# Altium PCB bci02_corrected.PcbDoc
Units mil, origin at the board's own origin, x right, y up, seen from the top; angles counter-clockwise.
Board outline 1917.32 x 1437.01 mil, 2 copper layers (Top Layer, Bottom Layer), stack 12.8 mil thick; 69 components, 67 nets, 283 pads, 40 vias.
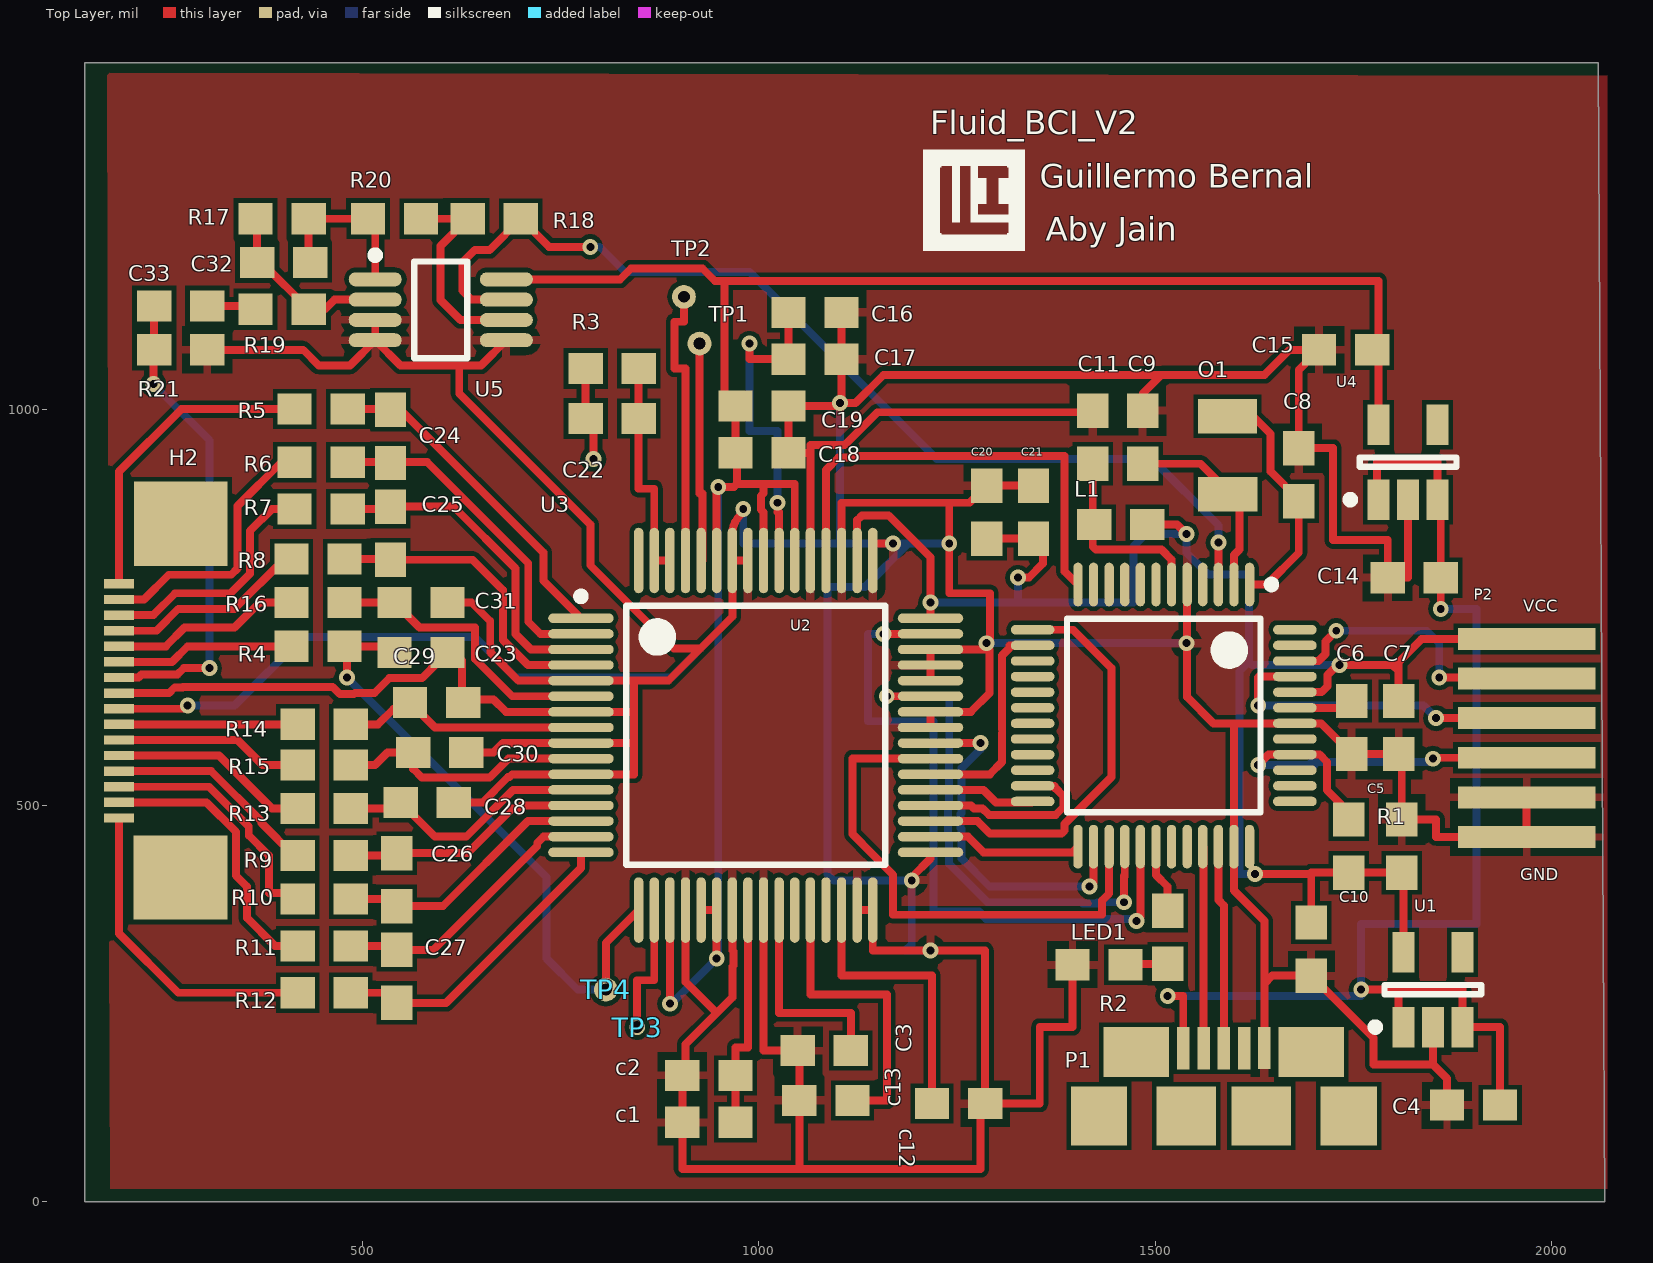
[diagram p0: Top Layer view]
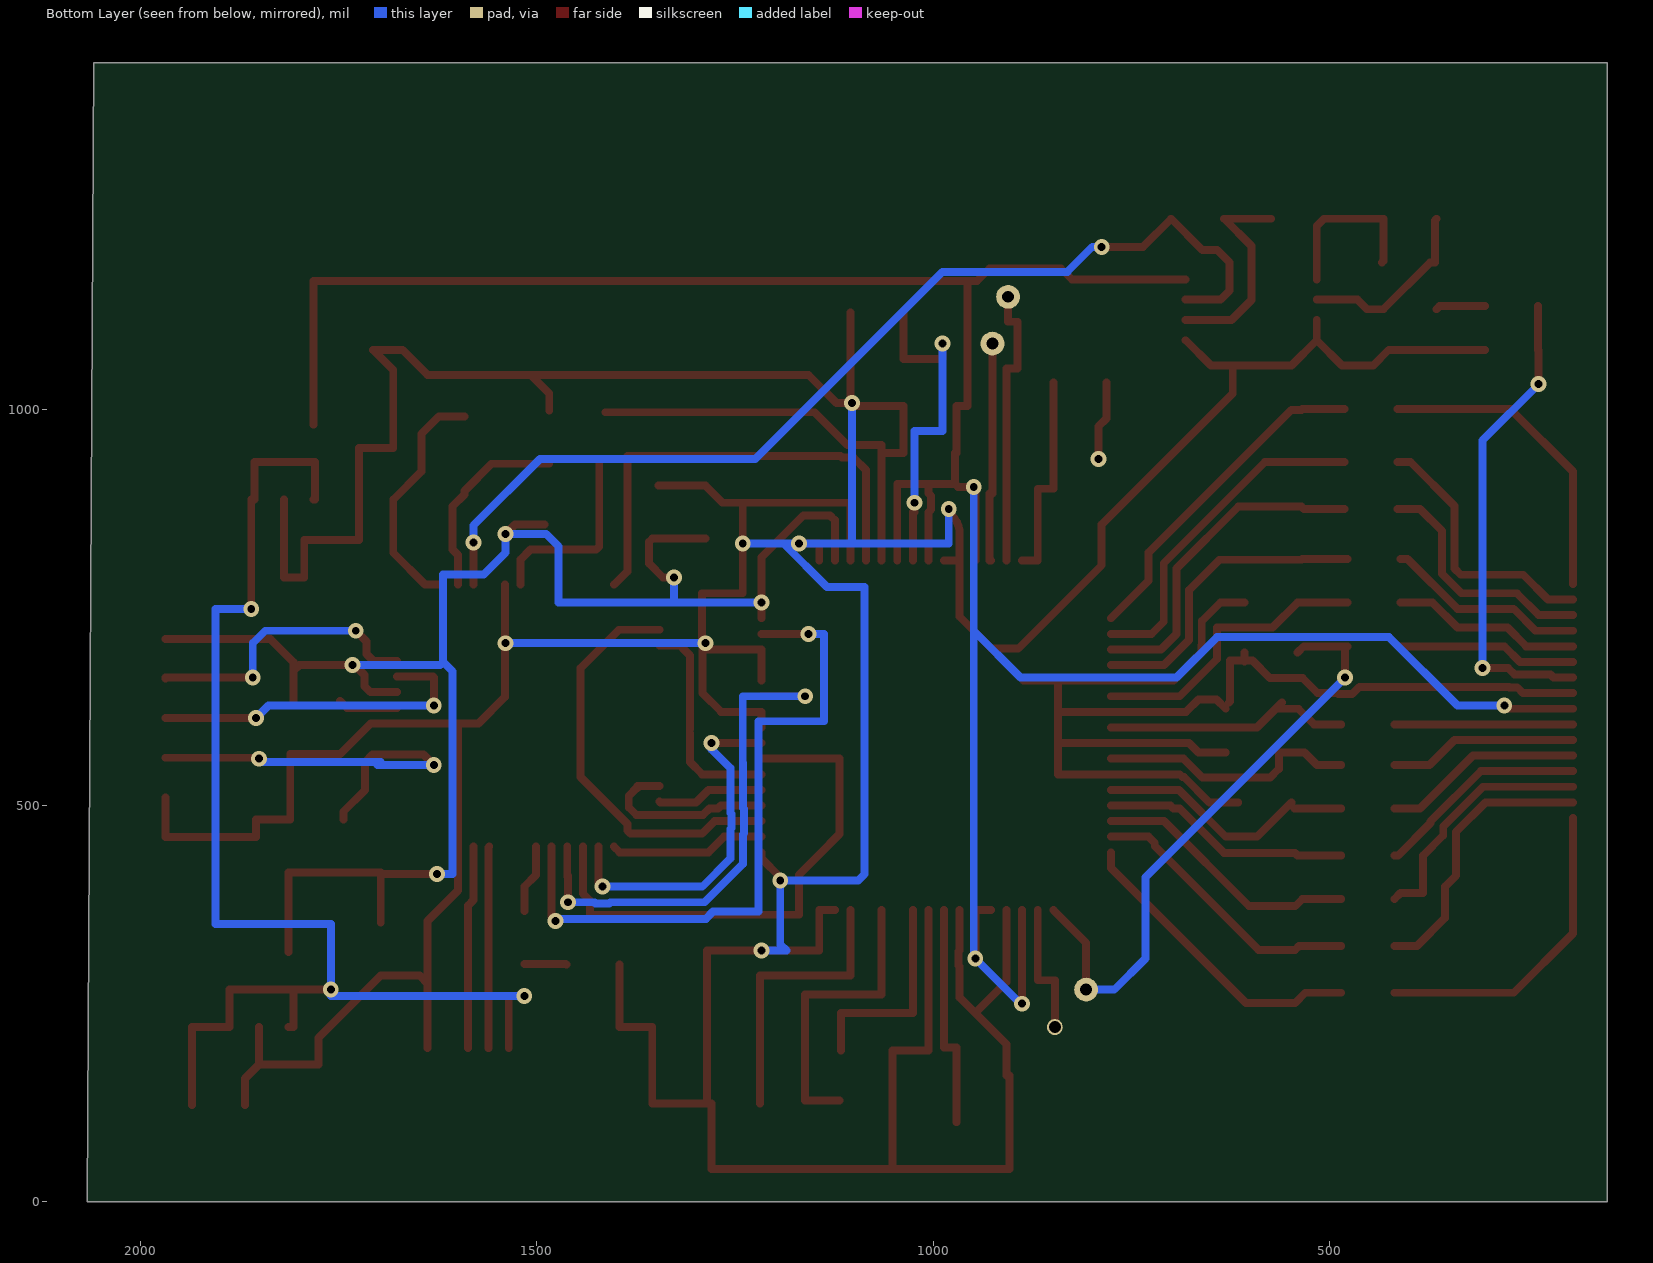
[diagram p1: Bottom Layer view, seen from below]

## Layer stack, top to bottom
Top Solder: solder mask 0.4, Solder Resist, Dk 3.5
Top Layer: signal copper 1.4
Dielectric 1: core 10, FR-4, Dk 4.2
Bottom Layer: signal copper 1.4
Bottom Solder: solder mask 0.4, Solder Resist, Dk 3.5

## Board outline
149.61,1437.01 149.61,0 2066.93,0 2059.06,1437.01
cut-out: 4921.26,576.77 4921.26,2155.59 4921.26,576.77

## Design rules (kind name [scope] priority, off if disabled: settings)
Clearance [All] p1: gap=6
HoleSize [All] p1: absolutevalues=TRUE maxlimit=100 minlimit=10 maxpercent=80.000 minpercent=20.000
PolygonConnect [All] p1: connectstyle=Relief reliefconductorwidth=10 reliefentries=4 polygonreliefangle="90 Angle" airgapwidth=10
RoutingVias [All] p1: holewidth=28 width=50 viastyle="Through Hole" minholewidth=28 minwidth=50 maxholewidth=28 maxwidth=50
SolderMaskExpansion [All] p1: expansion=4
Width [All] p1: maxlimit=10 minlimit=10 preferedwidth=10
29 further rules are at their usual default settings.

## Components (designator, comment, footprint, x,y, rotation, side; value= is the part's Value field where it differs from the comment)
c1 "1uF" 3-0603 937.01,100.39 r180 top
c2 "10uF" 3-0603 937.01,159.45 r180 top
C3 "1uF" 3-0603 1082.68,190.94 r180 top
C4 "10uF" 3-0603 1901.57,122.05 r180 top
C5 "100uF" 3-0603 1811.02,448.82 r90 top
C6 "0.1uF" 3-0603 1748.03,598.43 r270 top
C7 "0.1uF" 3-0603 1807.09,598.43 r270 top
C8 "18pF" 3-0603 1681.1,917.32 r90 top
C9 "18pF" 3-0603 1484.25,964.57 r90 top
C10 "Capacitor" 3-0603 1696.85,318.9 r90 top
C11 "0.1uF" 3-0603 1421.26,964.57 r270 top
c12 "1uF" 3-0603 1251.97,124.02 r0 top
c13 "100uF" 3-0603 1084.65,127.95 r180 top
C14 "10uF" 3-0603 1826.77,787.4 r180 top
C15 "100uF" 3-0603 1740.16,1074.8 r180 top
C16 "1uF" 3-0603 1070.87,1122.05 r180 top
C17 "0.1uF" 3-0603 1070.87,1062.99 r180 top
C18 "1uF" 3-0603 1003.94,944.88 r180 top
C19 "0.1uF" 3-0603 1003.94,1003.94 r180 top
C20 "1uF" 3-0603 1287.4,870.08 r270 top
C21 "0.1uF" 3-0603 1346.46,870.08 r270 top
C22 "1nF" 3-0603 814.96,988.19 r0 top
C23 "1uF" 0603W 574.8,692.91 r180 top
C24 "0.1uF" 0603W 535.43,964.57 r90 top
C25 "0.1uF" 0603W 535.43,842.52 r90 top
C26 "0.1uF" 0603W 543.31,405.51 r90 top
C27 "0.1uF" 0603W 543.31,283.46 r90 top
C28 "1uF" 0603W 582.68,503.94 r180 top
C29 "1uF" 0603W 594.49,629.92 r180 top
C30 "1uF" 0603W 598.43,566.93 r180 top
C31 "1uF" 0603W 574.8,755.91 r180 top
C32 "10nF" 0603W 401.57,1185.04 r180 top
C33 "0.1uF" 0603W 271.65,1129.92 r180 top
H2 "0.5mm 16pos FPC" "FPC 16 PIN 0.5mm" -300.28,645.61 r90 top
L1 "INDUCTOR Low DCR" 3-0603 1456.69,854.33 r0 top
LED1 "LED" 0603W 1515.75,334.65 r270 top
O1 "32.768 Crystal" "32.768 Crystal" 1590.55,988.19 r270 top
P1 "microB USB Receptacle" "MicroB USB Standarad SMT" 1556.36,242.25 r0 top
P2 "6 pin smd 1.27mm female" "1.27mm smd female" 1965.2,699.19 r270 top
R1 "10K" 3-0603 1744.09,448.82 r90 top
R2 "330" 3-0603 1429.13,299.21 r0 top
R3 "1M" 3-0603 814.96,1051.18 r0 top
R4 "1K" 0603W 444.88,700.79 r180 top
R5 "1K" 0603W 448.82,1000 r180 top
R6 "1K" 0603W 448.82,933.07 r180 top
R7 "1K" 0603W 448.82,874.02 r180 top
R8 "1K" 0603W 444.88,811.02 r180 top
R9 "1K" 0603W 452.76,437.01 r180 top
R10 "1K" 0603W 452.76,381.89 r180 top
R11 "1K" 0603W 452.76,322.83 r180 top
R12 "1K" 0603W 452.76,263.78 r180 top
R13 "1K" 0603W 452.76,496.06 r180 top
R14 "1K" 0603W 452.76,602.36 r180 top
R15 "1K" 0603W 452.76,551.18 r180 top
R16 "1K" 0603W 444.88,755.91 r180 top
R17 "1M" 0603W 397.64,1240.16 r0 top
R18 "2k" 0603W 665.35,1240.16 r0 top
R19 "1M" 0603W 397.64,1125.98 r0 top
R20 "1k" 0603W 539.37,1240.16 r0 top
R21 "300k" 0603W 271.65,1074.8 r180 top
TP1 "Test point small" "Test point small"#1 925.2,1082.68 r0 top
TP2 "Test point small" "Test point small"#1 905.51,1141.73 r90 top
TP3 "Test point small" "Test point small"#2 846.46,220.47 r90 top
TP4 "Test point small" "Test point small"#1 807.09,267.72 r90 top
U1 "MIC5205_VOLTAGE_REG" SOT-23-CT5_M 1850.39,267.72 r90 top
U2 "Component_1" TQFN48 1511.81,614.17 r270 top
U3 "ADS1299*" TI-PAG64_M 996.06,588.58 r0 top
U4 "MIC5205_VOLTAGE_REG" SOT-23-CT5_M 1818.9,933.07 r90 top
U5 "MCP6422" MSOP-MS8_N 598.43,1125.98 r0 top

## Footprints (in the part's own frame and the unit in brackets; to place one, negate y for a bottom-side part, rotate by r counter-clockwise, add the part's x,y. Pads: shape width x height; smd on the part's side, far side on the other; paste and mask are expansions set on the pad)
"1.27mm smd female" [mm] "female connector smd for 1,27mm"
  rect 0.7x4.4 smd: 1(-0.279,0.083) 2(0.99,0.084) 3(2.259,0.084) 4(3.529,0.084) 5(4.798,0.084) 6(6.068,0.085)
3-0603 [mm] "Chip Resistor; Body 1.6 x 0.9 mm (LxW typ)"
  rect 1.1x1 smd: 1(-0.85,0) 2(0.85,0)
"32.768 Crystal" [mm] "for BLE radio"
  rect 1.1x1.9 smd: 1(-0.07,0.019) 2(2.432,0.02)
  body extent -0.39,-0.71 2.81,0.78, height 0.9
0603W [mm]
  rect 1.1x1 smd: 1(-0.825,0) 2(0.875,0)
  body extent -0.8,-0.4 0.8,0.4, height 0.45
"FPC 16 PIN 0.5mm" [mm]
  rect 0.3x0.96 smd mask+0.06: 1(-4.099,-12.527) 2(-3.599,-12.527) 3(-3.099,-12.527) 4(-2.599,-12.527) 5(-2.099,-12.527) 6(-1.599,-12.527) 7(-1.099,-12.527) 8(-0.599,-12.527) 9(-0.099,-12.527) 10(0.401,-12.527) 11(0.901,-12.527) 12(1.401,-12.527) 13(1.901,-12.527) 14(2.401,-12.527) 15(2.901,-12.527) 16(3.401,-12.527)
  rect 2.7x3 smd mask+0.06: 17(-6.009,-14.497) 18(5.325,-14.505)
  body extent -7.54,-17.32 6.86,-12.22, height 2.05
"MicroB USB Standarad SMT" [mm] "FOR ZX Series Hirose"
  rect 0.4x1.35 smd: 1(-0.533,-1.232) 2(0.119,-1.231) 3(0.769,-1.23) 4(1.419,-1.229) 5(2.069,-1.229)
  rect 1.8x1.9 smd: NC(-3.235,-3.405) NC(4.768,-3.403)
  rect 2.1x1.6 smd: NC(-2.033,-1.357) NC(3.568,-1.353)
  rect 1.9x1.9 smd: NC(-0.432,-3.404) NC(1.968,-3.403)
  body extent -3.25,-6.17 4.66,-0.51, height 2.78
MSOP-MS8_N [mm]
  oval 1.7x0.45 smd: 1(-2.091,0.958) 2(-2.091,0.308) 3(-2.091,-0.342) 4(-2.091,-0.992) 5(2.109,-0.992) 6(2.109,-0.342) 7(2.109,0.308) 8(2.109,0.958)
  silkscreen extent -2.22,-1.57 0.86,1.86, body extent -1.59,-1.62 1.61,1.58, height 1.1
SOT-23-CT5_M [mm] "SOT23, 5-Leads, Body 2.9x1.6mm, Pitch 0.95mm, Lead Span 2.7mm, IPC Low Density"
  rect 1.3x0.7 smd: 1(-1.2,0.95) 2(-1.2,0) 3(-1.2,-0.95) 4(1.2,-0.95) 5(1.2,0.95)
  silkscreen extent -1.32,-1.55 0.15,1.97, body extent -0.9,-1.55 0.9,1.55, height 1.45
"Test point small"#1 [mil]
  round 30 hole 15: 0(0,0)
"Test point small"#2 [mil]
  round 20 hole 15: 0(0,0)
TI-PAG64_M [mm] "QFP, 64-Leads, Body 10x10mm, Pitch 0.5mm, IPC Low Density"
  oval 2.1x0.3 smd: 1(-5.6,3.75) 2(-5.6,3.25) 3(-5.6,2.75) 4(-5.6,2.25) 5(-5.6,1.75) 6(-5.6,1.25) 7(-5.6,0.75) 8(-5.6,0.25) 9(-5.6,-0.25) 10(-5.6,-0.75) 11(-5.6,-1.25) 12(-5.6,-1.75) 13(-5.6,-2.25) 14(-5.6,-2.75) 15(-5.6,-3.25) 16(-5.6,-3.75) 33(5.6,-3.75) 34(5.6,-3.25) 35(5.6,-2.75) 36(5.6,-2.25) 37(5.6,-1.75) 38(5.6,-1.25) 39(5.6,-0.75) 40(5.6,-0.25) 41(5.6,0.25) 42(5.6,0.75) 43(5.6,1.25) 44(5.6,1.75) 45(5.6,2.25) 46(5.6,2.75) 47(5.6,3.25) 48(5.6,3.75)
  oval 0.3x2.1 smd: 17(-3.75,-5.6) 18(-3.25,-5.6) 19(-2.75,-5.6) 20(-2.25,-5.6) 21(-1.75,-5.6) 22(-1.25,-5.6) 23(-0.75,-5.6) 24(-0.25,-5.6) 25(0.25,-5.6) 26(0.75,-5.6) 27(1.25,-5.6) 28(1.75,-5.6) 29(2.25,-5.6) 30(2.75,-5.6) 31(3.25,-5.6) 32(3.75,-5.6) 49(3.75,5.6) 50(3.25,5.6) 51(2.75,5.6) 52(2.25,5.6) 53(1.75,5.6) 54(1.25,5.6) 55(0.75,5.6) 56(0.25,5.6) 57(-0.25,5.6) 58(-0.75,5.6) 59(-1.25,5.6) 60(-1.75,5.6) 61(-2.25,5.6) 62(-2.75,5.6) 63(-3.25,5.6) 64(-3.75,5.6)
  silkscreen extent -5.72,-4.15 4.15,4.57, body extent -5,-5 5,5, height 1.2
TQFN48 [mm] "TSQFP, 48-Leads, Body 7.00x7.00mm, Pitch 0.50mm, IPC High Density"
  oval 1.4x0.3 smd mask+0.05: 1(-4.18,2.724) 2(-4.18,2.224) 3(-4.18,1.724) 4(-4.18,1.224) 5(-4.18,0.724) 6(-4.18,0.224) 7(-4.18,-0.276) 8(-4.18,-0.776) 9(-4.18,-1.276) 10(-4.18,-1.776) 11(-4.18,-2.276) 12(-4.18,-2.776) 25(4.22,-2.776) 26(4.22,-2.276) 27(4.22,-1.776) 28(4.22,-1.276) 29(4.22,-0.776) 30(4.22,-0.276) 31(4.22,0.224) 32(4.22,0.724) 33(4.22,1.224) 34(4.22,1.724) 35(4.22,2.224) 36(4.22,2.724)
  oval 0.3x1.4 smd mask+0.05: 13(-2.73,-4.226) 14(-2.23,-4.226) 15(-1.73,-4.226) 16(-1.23,-4.226) 17(-0.73,-4.226) 18(-0.23,-4.226) 19(0.27,-4.226) 20(0.77,-4.226) 21(1.27,-4.226) 22(1.77,-4.226) 23(2.27,-4.226) 24(2.77,-4.226) 37(2.77,4.174) 38(2.27,4.174) 39(1.77,4.174) 40(1.27,4.174) 41(0.77,4.174) 42(0.27,4.174) 43(-0.23,4.174) 44(-0.73,4.174) 45(-1.23,4.174) 46(-1.73,4.174) 47(-2.23,4.174) 48(-2.73,4.174)
  silkscreen extent -4.31,-3.13 3.12,3.55, body extent -4.48,-4.53 4.52,4.47, height 1.2

## Part data
c1 c2 C3 C6 C7 C8 C9 C11 c12 c13 C16 C17 C18 C19 C20 C21 C22 C23 C24 C25 C26 C27 C28 C29 C30 C31 C32 C33: library part Capacitor, "SMD Cap 1206"
C4 C5 C14 C15: library part "Polarized Cap"
C10: "SMD Cap 1206"
LED1: "LED SMD 1206/0603"
R1 R2 R3 R4 R5 R6 R7 R8 R9 R10 R11 R12 R13 R14 R15 R16 R17 R18 R19 R20 R21: library part Resistor
U1 U4: "5V LDO SMD"
U3: library part ADS1299, "IC AFE 24BIT 16KSPS LN 64TQFP"
U5: "4.4 µA/Amplifier, 90 kHz Op Amp"

## Via types
v1: diameter 20, hole 10, Top Layer to Bottom Layer, 40 vias

## Nets (pads, with @x,y where several pads share a name; then routed paths per layer and width w, separated by ;. In a path a pad name is that pad's centre, name@x,y a point inside that pad or via, vN(x,y) a via of type N, cw(c..) or ccw(c..) an arc to the next point about the centre after c; other vN are vias at no path point)
5V: C15.1 C18.2 C19.2 H2.8 U3.19 U3.21 U3.22 U3.54 U3.56 U3.59 U4.5 U5.8 | length 3676.9
  Top Layer w10: H2.8 275.59,622.05 v1(279.53,625.98) ; U5.8 825.11,1163.69 838.58,1177.17 929.13,1177.17 944.88,1161.42 956.69,1161.42 ; v1(887.8,250) U3.19 ; U3.21 U3.22 v1(946.85,307.09) ; U3.59 946.85,905.51 948.82,903.54 v1(948.82,901.57) 968.5,901.57 972.44,905.51 ; U3.56 1005.91,869.91 1002.62,873.19 1002.62,890.59 1005.91,893.87 1005.91,905.51 ; U3.54 1045.28,905.51 1005.91,905.51 ; U4.5 1781.5,1161.42 956.69,1161.42 ; 956.69,1161.42 956.69,1003.94 C19.2 C18.2 972.44,944.88 972.44,905.51 ; 972.44,905.51 1005.91,905.51
  Bottom Layer w10: v1(279.53,625.98) 338.58,625.98 425.2,712.6 641.73,712.6 692.91,661.42 889.76,661.42 948.82,720.47 ; v1(887.8,250) 889.76,250 v1(946.85,307.09) 948.82,307.09 948.82,720.47 ; v1(948.82,901.57) 948.82,720.47
A0: R18.2 U2.3 U5.7 | length 1307
  Top Layer w10: U5.7 637.49,1138.1 625.98,1149.61 625.98,1185.04 641.73,1200.79 660.43,1200.79 R18.2 735.24,1204.72 v1(787.4,1204.72) ; U2.3 v1(1579.69,831.66)
  Bottom Layer w10: v1(787.4,1204.72) 799.21,1204.72 830.71,1173.23 988.19,1173.23 1224.41,937.01 1496.06,937.01 1579.69,853.38 v1(1579.69,831.66)
BIAS: C22.1 R3.1 | length 100.5
  Top Layer w10: R3.1@781.5,1033.46 C22.1 791.34,978.35 v1(791.34,937.01)
BIASINV: TP2.0 U3.61 | length 358.3
  Top Layer w10: TP2.0 905.51,1110.24 893.7,1110.24 893.7,1051.18 907.48,1051.18 U3.61
CLK: U2.24 U3.37 | length 135.9
  Top Layer w10: U3.37 1283.46,519.68 1299.21,503.94 1344.24,503.94 U2.24
CLKSEL: U2.12 U3.52 | length 591.9
  Top Layer w10: U3.52 1084.65,923.23 1100.14,938.72 1114.89,938.72 1117.12,940.94 1385.83,940.94 1385.83,795.28 1402.34,778.76 U2.12
DRDY: U2.29 U3.47 | length 868.7
  Top Layer w10: v1(1157.48,716.54) U3.47 ; v1(1476.38,354.33) 1481.63,359.58 1481.63,447.68 U2.29
  Bottom Layer w10: v1(1157.48,716.54) 1137.8,716.54 1137.8,606.3 1220.47,606.3 1220.47,366.14 1277.58,366.14 1286.77,356.95 1473.75,356.95 v1(1476.38,354.33)
EDA-: C33.2 H2.10 R21.2 | length 605.5
  Top Layer w10: H2.10 217.53,661.42 221.22,665.1 266.47,665.1 274.6,673.23 v1(307.09,673.23) ; v1(236.22,1031.5) 236.22,1073.82 R21.2 C33.2
  Bottom Layer w10: v1(236.22,1031.5) 307.09,960.63 v1(307.09,673.23)
GND: c1.2 c2.2 C3.2 C4.2 C5.2 C6.2 C7.2 C8.2 C9.2 C10.1 C11.1 c12.2 c13.2 C14.2 C15.2 C16.1 C17.1 C18.1 C19.1 C20.1 C21.1 C23.1 C28.1 C29.1 C30.1 C31.1 H2.9 P1.5 P2.5 P2.6 R2.1 R21.1 U1.2 U2.5 U2.35 U2.42 U3.5 U3.7 U3.9 U3.11 U3.20 U3.23 U3.25 U3.31 U3.32 U3.33 U3.41 U3.42 U3.44 U3.45 U3.46 U3.49 U3.51 U3.53 U3.57 U3.58 U4.2 U5.3 U5.4 U5.5 | length 10845
  Top Layer w10: H2.9 255.91,641.73 263.28,649.1 273.1,649.1 273.6,649.61 462.43,649.61 471.62,640.42 489.01,640.42 490.33,641.73 514.96,641.73 533.83,660.61 574.98,660.61 597.19,682.82 C23.1@607.28,682.82 ; R21.1 425.2,1074.8 444.88,1055.12 484.29,1055.12 U5.4 ; U5.3 U5.4 ; C23.1@607.28,681.64 C23.1@607.28,682.82 ; C23.1 C23.1@607.28,682.82 ; C31.1 637.8,755.91 661.17,732.54 661.17,702.03 661.42,701.78 661.42,692.91 696.85,657.48 U3.5 842.52,657.48 ; C28.1 651.6,503.94 683.34,535.68 685.29,535.68 688.98,539.37 U3.11 842.52,539.37 842.52,578.74 ; C29.1 625.73,631.16 625.73,682.82 C23.1@607.28,682.82 ; C30.1 665.35,566.93 677.17,578.74 U3.9 842.52,578.74 ; C29.1@630.91,622.05 642.72,633.86 665.35,633.86 681.1,618.11 U3.7 842.52,618.11 ; U5.5 649.64,1055.12 622.05,1055.12 ; U3.20 907.48,277.56 944.88,240.16 ; U3.23 966.54,317.1 967.85,315.79 967.85,298.39 966.54,297.07 966.54,257.87 907.48,198.82 907.48,159.45 c2.2 c1.2 903.54,41.34 1051.18,41.34 ; v1@976.38,866.14 ccw(c1000.14,842.38) 966.54,842.38 U3.58 ; U3.57 U3.58 ; U3.25 1005.91,190.94 C3.2 1051.18,190.94 c13.2 1051.18,41.34 ; U3.53 1064.96,944.88 ; v1(1102.36,1007.87) v1@1104.33,1007.87 ; U3.51 1104.33,881.89 1240.16,881.89 ; C16.1 C17.1 v1@1104.33,1007.87 ; U3.31 U3.32 1143.7,316.93 v1(1216.54,316.93) 1285.43,316.93 c12.2 ; U3.49 1143.7,830.71 v1(1169.29,830.71) ; v1(1192.91,405.51) 1192.91,409.45 1216.54,433.07 U3.33 ; U3.41 U3.42 1267.39,618.11 1290.88,641.6 v1@1290.88,696.39 ; U3.44 U3.45 U3.46 v1@1287.4,696.85 ; v1@1291.34,709.2 1291.34,767.72 1240.16,767.72 v1(1240.16,830.71) 1240.16,881.89 ; C21.1 C20.1 1265.75,881.89 1240.16,881.89 ; R2.1 1395.67,220.47 1354.33,220.47 1354.33,124.02 c12.2 ; C11.1@1413.39,996.06 1149.61,996.06 1108.27,954.72 1064.96,954.72 1064.96,944.88 ; C9.2 1484.25,1019.69 1507.87,1043.31 ; U2.5 1540.32,636.85 1573.6,603.56 1602.36,603.56 ; P1.5 1637.8,275.6 ; U4.2 1818.9,787.4 C14.2 1793.31,834.65 1724.41,834.65 1724.41,950.79 C8.2 1681.1,1049.21 C15.2 1669.29,1074.8 1637.8,1043.31 1507.87,1043.31 ; U1.2 1850.39,173.23 ; C4.2 1868.11,155.51 1850.39,173.23 ; P2.5 P2.6 1854.33,460.3 1854.33,482.28 C5.2 1811.02,564.96 C7.2 C6.2 1709.43,603.56 U2.42 1602.36,603.56 ; U5.4 547.9,1055.12 622.05,1055.12 ; 622.05,1055.12 622.05,1019.69 787.4,854.33 787.4,803.15 892.72,697.83 926.18,697.83 ; 842.52,578.74 842.52,618.11 ; 842.52,618.11 842.52,657.48 ; 842.52,657.48 885.83,657.48 926.18,697.83 ; 926.18,697.83 966.54,738.19 U3.58 ; 1051.18,41.34 1279.53,41.34 1279.53,124.02 c12.2 ; 1064.96,944.88 C18.1 C19.1 1104.33,1003.94 v1@1104.33,1007.87 ; v1@1104.33,1007.87 1122.05,1007.87 1157.48,1043.31 1507.87,1043.31 ; 1602.36,603.56 1599.37,600.57 U2.35 1599.37,392.75 1637.8,354.33 1637.8,275.6 ; 1637.8,275.6 1647.64,285.43 C10.1 1775.59,206.69 1775.59,173.23 1850.39,173.23
  Bottom Layer w10: v1(980.32,874.02) 980.32,830.71 1102.36,830.71 ; v1(1102.36,1007.87) 1102.36,830.71 ; v1(1216.54,316.93) 1185.04,316.93 1192.91,324.8 v1(1192.91,405.51) 1094.49,405.51 1086.61,413.39 1086.61,775.59 1133.86,775.59 1188.98,830.71 ; v1(1240.16,830.71) 1188.98,830.71 ; v1(1287.4,704.72) v1(1539.37,704.72) ; 1102.36,830.71 v1(1169.29,830.71) 1188.98,830.71
LED1: LED1.1 U2.30 | length 87.1
  Top Layer w10: U2.30 1500.95,412.44 1515.75,397.64 LED1.1
M1+: C27.1 R12.1 U3.16 | length 385.9
  Top Layer w10: R12.1 530.51,263.78 C27.1 605.32,250.98 775.59,421.26 U3.16
M1+x: H2.1 R12.2 | length 402
  Top Layer w10: H2.1 192.91,338.58 267.72,263.78 R12.2
M1-: C27.2 R11.1 U3.15 | length 353.8
  Top Layer w10: R11.1 538.39,322.83 C27.2 589.57,317.91 720.47,448.82 720.47,452.76 728.35,460.63 U3.15
M1-x: H2.2 R11.2 | length 355.9
  Top Layer w10: H2.2 303.33,503.94 340.52,466.74 340.52,411.45 354.33,397.64 354.33,358.27 389.76,322.83 R11.2
M2+: C26.1 R10.1 U3.14 | length 338.5
  Top Layer w10: R10.1 534.45,381.89 C26.1 601.38,373.03 708.66,480.31 U3.14
M2+x: H2.3 R10.2 | length 318.2
  Top Layer w10: H2.3 306.27,523.62 356.52,473.37 356.52,462.37 381.89,437.01 381.89,389.76 410.43,389.76 R10.2
M2-: C26.2 R9.1 U3.13 | length 316.4
  Top Layer w10: R9.1 540.35,437.01 C26.2 632.87,439.96 688.98,496.06 696.85,496.06 700.79,500 U3.13
M2-x: H2.4 R9.2 | length 270.7
  Top Layer w10: H2.4 309.21,543.31 372.52,479.99 372.52,477.87 413.39,437.01 R9.2
M3+: C25.1 R8.1 U3.4 | length 390.6
  Top Layer w10: R8.1 534.45,811.02 C25.1 638.78,810.04 677.17,771.65 677.17,708.66 708.66,677.17 U3.4
M3+x: H2.13 R8.2 | length 255
  Top Layer w10: H2.13 240.16,720.47 267.72,748.03 338.58,748.03 401.57,811.02 R8.2
M3-: C25.2 R7.1 U3.3 | length 418.6
  Top Layer w10: R7.1 532.48,874.02 C25.2 615.16,876.97 693.17,798.96 693.17,716.28 712.6,696.85 U3.3
M3-x: H2.14 R7.2 | length 308.6
  Top Layer w10: H2.14 236.22,740.16 263.78,767.72 333.65,767.72 358.27,792.33 358.27,846.46 385.83,874.02 R7.2
M4+: C24.1 R6.1 U3.2 | length 427.2
  Top Layer w10: R6.1 581.68,933.07 709.17,805.59 709.17,731.78 724.41,716.54 U3.2
M4+x: H2.15 R6.2 | length 339.3
  Top Layer w10: H2.15 224.41,759.84 255.66,791.1 334.4,791.1 342.27,798.96 342.27,853.08 342.52,853.34 342.52,877.95 397.64,933.07 R6.2
M4-: C24.2 R5.1 U3.1 | length 424.3
  Top Layer w10: R5.1 534.45,1000 C24.2 548.23,999.02 728.35,818.9 728.35,783.46 U3.1
M4-x: H2.16 R5.2 | length 395.8
  Top Layer w10: H2.16 192.91,921.26 271.65,1000 R5.2
MISO: U2.28 U3.43 | length 660.7
  Top Layer w10: v1(1161.42,637.8) U3.43 ; v1(1460.63,377.95) 1460.63,411.35 1461.58,410.4 U2.28
  Bottom Layer w10: v1(1161.42,637.8) 1240.16,637.8 1240.16,554.12 1239.91,553.87 1239.91,496.96 1238.59,495.64 1238.59,464.99 1239.91,463.67 1239.91,426.44 1288.4,377.95 1407.31,377.95 1408.62,376.64 1426.02,376.64 1427.34,377.95 v1(1460.63,377.95)
MOSI: U2.25 U3.34 | length 197.1
  Top Layer w10: U3.34 1263.78,460.63 1283.46,440.94 1395.42,440.94 U2.25
Netc1_1: c1.1 c2.1 U3.24 | length 283.5
  Top Layer w10: c1.1 c2.1 970.47,194.88 986.22,194.88 U3.24
NetC3_1: C3.1 U3.26 | length 267.7
  Top Layer w10: U3.26 1025.59,238.19 1116.14,238.19 C3.1
NetC6_1: C6.1 U2.43 | length 75.5
  Top Layer w10: U2.43 1739.39,623.25 C6.1
NetC8_1: C8.1 O1.1 U2.1 | length 306.6
  Top Layer w10: O1.1 1623.23,990.94 1645.67,968.5 1645.67,921.26 1681.1,885.83 C8.1 1681.1,818.9 1640.96,778.76 U2.1
NetC9_1: C9.1 O1.2 U2.2 | length 248.4
  Top Layer w10: C9.1 1557.09,931.1 1591.33,896.86 O1.2 1606.3,877.49 1606.3,822.83 1599.37,815.91 U2.2
NetC11_2: C11.2 L1.1 U2.6 | length 241.9
  Top Layer w10: C11.2 1421.26,826.77 1425.2,822.83 1507.87,822.83 1520.63,810.07 U2.6
Netc12_1: c12.1 U3.30 | length 358.3
  Top Layer w10: U3.30 1104.33,285.43 1218.5,285.43 c12.1
Netc13_1: c13.1 U3.28 | length 379.9
  Top Layer w10: U3.28 1064.96,261.81 1161.42,261.81 1161.42,127.95 c13.1
NetC22_2: C22.2 R3.2 U3.62 U3.63 | length 263.8
  Top Layer w10: R3.2@848.43,1033.46 C22.2 848.43,899.61 868.11,899.61 U3.63 U3.62
NetC32_1: C32.1 R17.2 R20.1 U5.1 | length 211
  Top Layer w10: C32.1 432.09,1187.01 R17.2 R20.1 516.09,1230.95 U5.1
NetC32_2: C32.2 R17.1 R19.2 U5.2 | length 234.4
  Top Layer w10: R17.1 367.13,1238.19 C32.2 373.03,1185.04 R19.2 452.76,1125.98 464.88,1138.1 U5.2
NetC33_1: C33.1 R19.1 | length 62.7
  Top Layer w10: C33.1 361.22,1129.92 R19.1
NetLED1_2: LED1.2 R2.2 | length 53.6
  Top Layer w10: R2.2 1463.58,300.2 LED1.2
NetR18_1: R18.1 R20.2 U5.6 | length 269.2
  Top Layer w10: R20.2 R18.1 598.43,1205.71 598.43,1137.8 623.71,1112.51 U5.6
NetTP1_0: TP1.0 U3.60 | length 279.5
  Top Layer w10: TP1.0 925.2,893.7 929.13,893.7 929.13,809.06 U3.60
O1: C28.2 R13.1 U3.12 | length 328.8
  Top Layer w10: R13.1 C28.2@544.29,496.06 ; C28.2 591.54,460.63 630.92,460.63 689.97,519.68 U3.12
O1x: H2.5 R13.2 | length 253.1
  Top Layer w10: H2.5 318.9,562.99 385.83,496.06 R13.2
O2: C29.2 R14.1 U3.8 | length 315.5
  Top Layer w10: R14.1 519.69,602.36 539.37,622.05 C29.2@563.98,622.05 ; C29.2 591.54,598.43 U3.8
O2x: H2.7 R14.2 | length 225.4
  Top Layer w10: H2.7 R14.2
O3: C30.2 R15.1 U3.10 | length 331.8
  Top Layer w10: R15.1 515.75,551.18 531.5,566.93 C30.2 563.98,546.26 574.8,535.43 660.46,535.43 684.09,559.06 U3.10
O3x: H2.6 R15.2 | length 238.4
  Top Layer w10: H2.6 342.52,582.68 374.02,551.18 R15.2
O4: C31.2 R16.1 U3.6 | length 370.2
  Top Layer w10: R16.1 C31.2 571.85,724.41 641.73,724.41 641.73,685.04 688.98,637.8 U3.6
O4x: H2.12 R16.2 | length 240.4
  Top Layer w10: H2.12 251.97,700.79 275.59,724.41 338.58,724.41 370.08,755.91 R16.2
PWDN: U2.13 U3.35 | length 526.1
  Top Layer w10: U3.35 1275.59,480.32 1291.34,464.57 1381.89,464.57 1385.62,468.3 1385.62,476.71 1444.88,535.97 1444.88,673.23 1396.44,721.67 U2.13
RESET: P2.4 R1.2 U2.40 | length 532.5
  Top Layer w10: v1(1629.92,551.18) 1642.93,564.19 U2.40 1707.46,564.19 1716.54,555.12 1716.54,519.68 1744.09,492.13 R1.2 ; v1(1850.39,559.06) 1851.59,560.25 P2.4
  Bottom Layer w10: v1(1629.92,551.18) 1700.79,551.18 1696.85,555.12 1850.39,555.12 v1(1850.39,559.06)
RST: U2.23 U3.36 | length 236.4
  Top Layer w10: U3.36 1267.72,500 1271.4,496.32 1282.22,496.32 1290.3,488.23 1292.29,488.23 1292.59,487.94 1350.86,487.94 1351.16,488.23 1374.52,488.23 1384,497.71 1384,512.14 1374.09,522.04 1372.82,522.04 1372.82,524.82 U2.23
SCK: U2.26 U3.40 | length 448.1
  Top Layer w10: U3.40 v1(1279.53,578.74) ; v1(1417.32,397.64) 1422.21,402.52 U2.26
  Bottom Layer w10: v1(1279.53,578.74) 1279.53,570.87 1255.91,547.24 1255.91,490.33 1254.59,489.01 1254.59,471.62 1255.91,470.3 1255.91,433.07 1291.34,397.64 v1(1417.32,397.64)
SRB1: C23.2 R4.1 TP4.0 U3.17 | length 782
  Top Layer w10: v1(480.32,661.42) 480.32,697.83 R4.1 532.48,700.79 C23.2 ; TP4.0@807.09,259.84 TP4.0 807.09,326.77 U3.17
  Bottom Layer w10: v1(480.32,661.42) 732.28,409.45 732.28,307.09 771.65,267.72 TP4.0
SRB1x: H2.11 R4.2 | length 225.7
  Top Layer w10: H2.11 259.84,681.1 279.53,700.79 R4.2
SRB2: TP3.0 U3.18 | length 169.3
  Top Layer w10: TP3.0 846.46,279.53 868.11,279.53 U3.18
SS: U2.27 U3.39 | length 669.8
  Top Layer w10: U3.39 1118.11,559.06 1118.11,464.08 1130.75,451.44 1130.75,451.12 1169.29,412.58 1169.29,362.2 1433.07,362.2 1433.07,380.09 1441.89,388.91 U2.27
START: U2.14 U3.38 | length 277.1
  Top Layer w10: U3.38 1291.34,539.37 1306.88,554.91 1306.88,591.09 1307.09,591.3 1307.09,596.35 1306.88,596.56 1306.88,689.3 1316.28,698.7 1316.28,701.99 U2.14
SWCLK: P2.3 U2.45 | length 427.3
  Top Layer w10: v1(1629.92,625.98) 1629.92,661.42 1631.12,662.62 U2.45 ; v1(1854.33,610.24) P2.3
  Bottom Layer w10: v1(1629.92,625.98) 1838.58,625.98 v1(1854.33,610.24)
SWDIO: P2.2 U2.46 | length 368.4
  Top Layer w10: U2.46 1705.92,682.3 1714.7,691.08 1714.7,706.83 v1(1728.35,720.47) ; v1(1858.27,661.42) 1968.49,661.42 P2.2
  Bottom Layer w10: v1(1728.35,720.47) 1842.52,720.47 1858.27,704.72 v1(1858.27,661.42)
USBM: P1.2 U2.33 | length 254.7
  Top Layer w10: U2.33 1561.04,447.01 P1.2
USBP: P1.3 U2.34 | length 257.1
  Top Layer w10: U2.34 1579.69,380.94 1586.62,374.01 P1.3
VCAP3: C16.2 C17.2 U3.55 | length 427.2
  Top Layer w10: v1(988.19,1082.68) 988.19,1062.99 C17.2 C16.2 ; 1023.62,870.08 1025.59,870.08 U3.55
  Bottom Layer w10: v1(988.19,1082.68) 988.19,972.44 1023.62,972.44 v1(1023.62,881.89)
VCC: C5.1 C7.1 C10.2 C20.2 C21.2 L1.2 P2.1 R1.1 U1.5 U2.36 U2.44 U3.48 U3.50 | length 2231.2
  Top Layer w10: U3.50 1124.02,859.91 1130,865.89 1163.81,865.89 1216.54,813.16 U3.48 ; C20.2 C21.2 1354.33,836.61 1358.27,832.68 1358.27,805.12 1340.55,787.4 v1(1326.77,787.4) ; L1.2 1527.56,854.33 v1(1539.37,842.52) ; v1(1625.98,413.39) 1696.85,413.39 ; U2.44 1709.86,642.93 1717.35,650.42 1717.35,664.54 1729.97,677.16 v1(1732.28,677.16) 1799.21,677.16 1807.09,669.29 ; C10.2 1696.85,413.39 ; C7.1 1807.09,669.29 ; U1.5 1812.99,415.35 C5.1 R1.1 1696.85,415.35 1696.85,413.39 ; P2.1 1836.16,710.17 1807.09,681.1 1807.09,669.29
  Bottom Layer w10: v1(1216.54,755.91) 1326.77,755.91 ; v1(1326.77,787.4) 1326.77,755.91 ; v1(1625.98,413.39) 1606.3,413.39 1606.3,669.29 1618.11,681.1 ; v1(1732.28,677.16) 1622.05,677.16 1618.11,681.1 ; 1326.77,755.91 1472.44,755.91 1472.44,826.77 1488.19,842.52 v1(1539.37,842.52) 1539.37,818.9 1566.93,791.34 1618.11,791.34 1618.11,681.1
VUSB: C4.1 C14.1 P1.1 U1.1 U1.3 U4.1 U4.3 | length 1697.9
  Top Layer w10: v1(1515.75,259.84) 1535.37,259.84 P1.1 ; v1(1759.84,267.72) 1807.09,267.72 ; U4.1 1779.53,885.83 1779.53,933.07 1856.3,933.07 U4.3 1860.24,885.83 C14.1 v1(1860.24,748.03) ; U1.1 1807.09,220.47 1807.09,267.72 ; C4.1 1935.04,220.47 U1.3 1887.8,267.72 1807.09,267.72
  Bottom Layer w10: v1(1515.75,259.84) 1759.84,259.84 v1(1759.84,267.72) 1759.84,350.39 1905.51,350.39 1905.51,748.03 v1(1860.24,748.03)
pads on no net: H2.17 H2.18 P1.4 P1.NC U1.4 U2.4 U2.7 U2.8 U2.9 U2.10 U2.11 U2.15 U2.16 U2.17 U2.18 U2.19 U2.20 U2.21 U2.22 U2.31 U2.32 U2.37 U2.38 U2.39 U2.41 U2.47 U2.48 U3.27 U3.29 U3.64 U4.4

## Polygon pours and split planes (outlines as drawn)
GND on Top Layer "GndPlane" (solid, pour order 0): 165.35,0 161.42,1440.94 2086.61,1437.01 2086.61,0

## Silkscreen, mask and mechanical layers (free items; w line width, h text height)
Top Overlay:
  region: 125 vertices and 2 holes, not listed, extent 1207.68,1199.5 1335.63,1327.45
  text "Fluid_BCI_V2" at 1216.54,1346.46 h30
  text "Guillermo Bernal" at 1354.33,1279.53 h30
  text "Aby Jain" at 1362.2,1212.6 h30
  text "VCC" at 1964.57,744.09 h15
  text "GND" at 1960.63,405.51 h15
Mechanical 3:
  lines w10: 161.42,1440.94 2086.61,1437.01 2086.61,0 165.35,0 161.42,1440.94